# Altium PCB project_6.PcbDoc
Units mil, origin at the board's own origin, x right, y up, seen from the top; angles counter-clockwise.
Board outline 2962.9 x 2332.9 mil, 2 copper layers (Top Layer, Bottom Layer); 15 components, 40 nets, 96 pads, 3 vias.
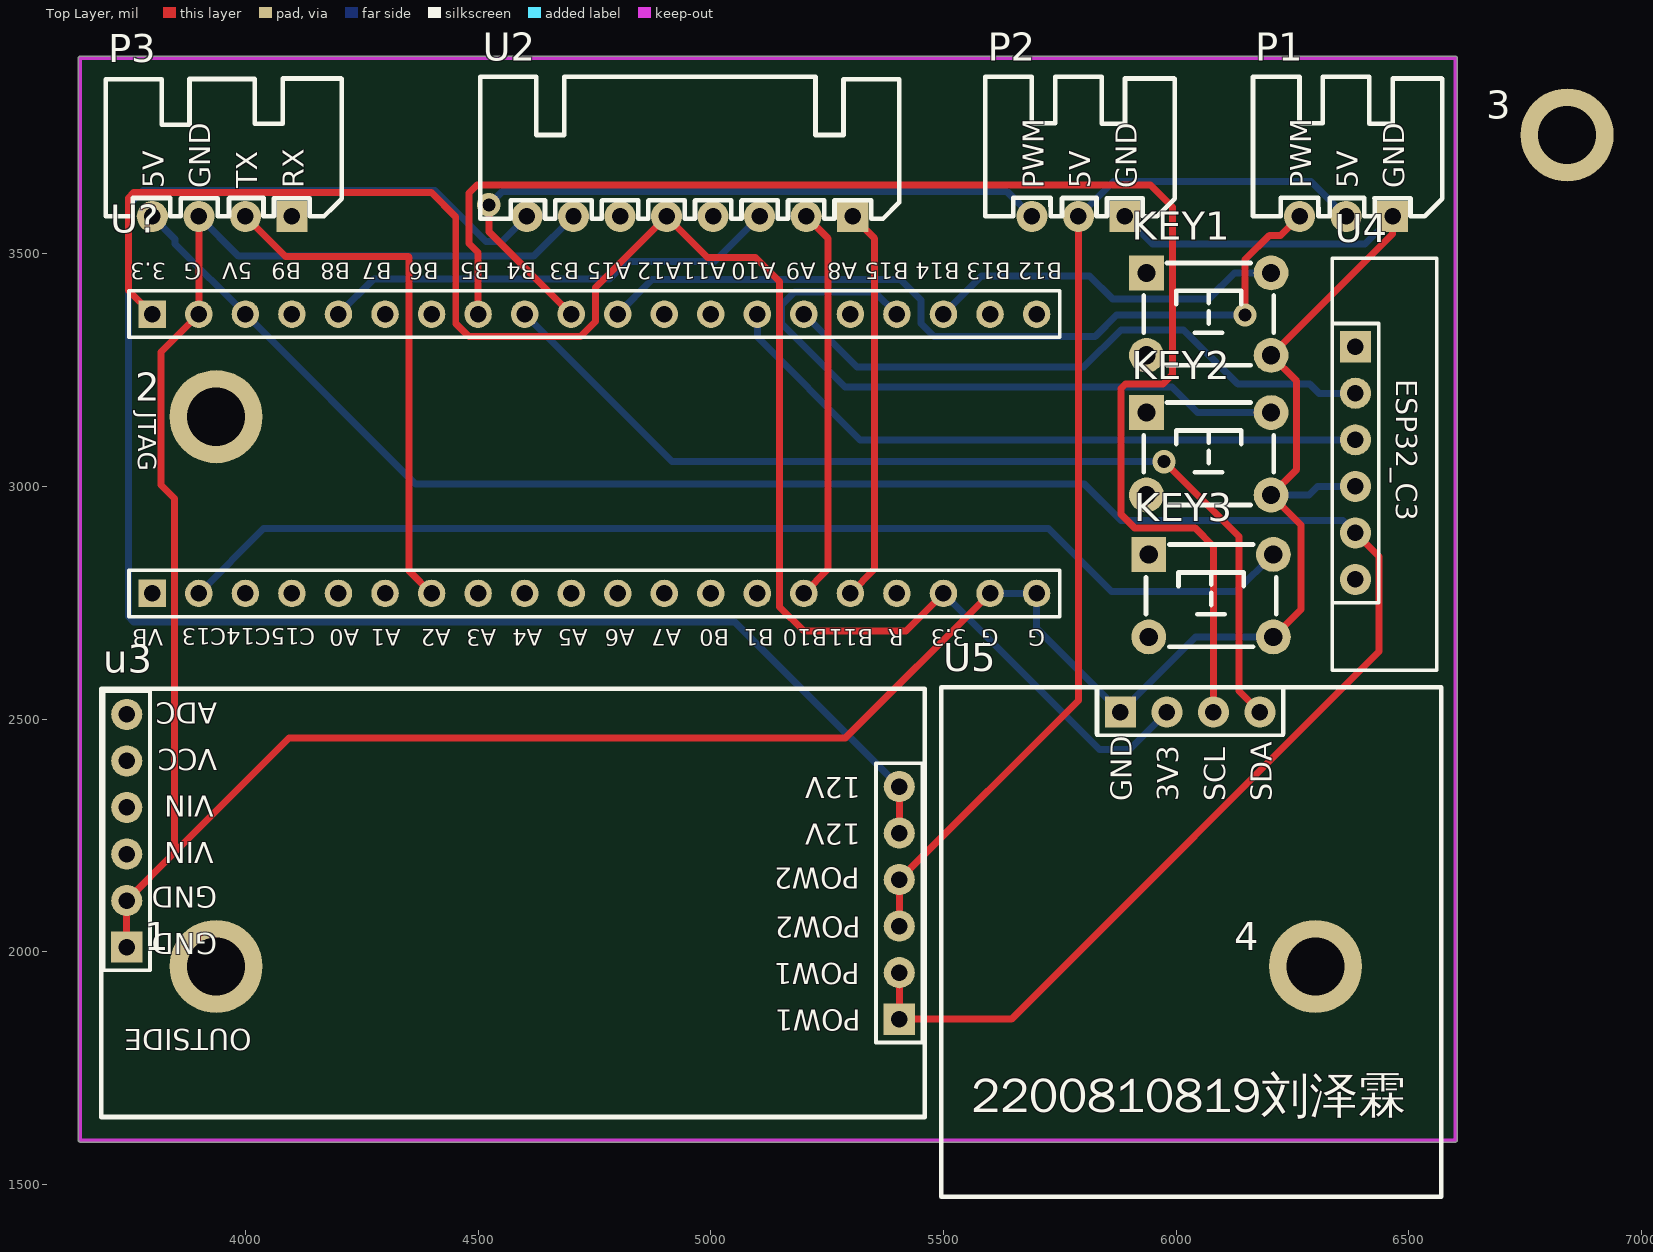
[diagram p0: Top Layer view]
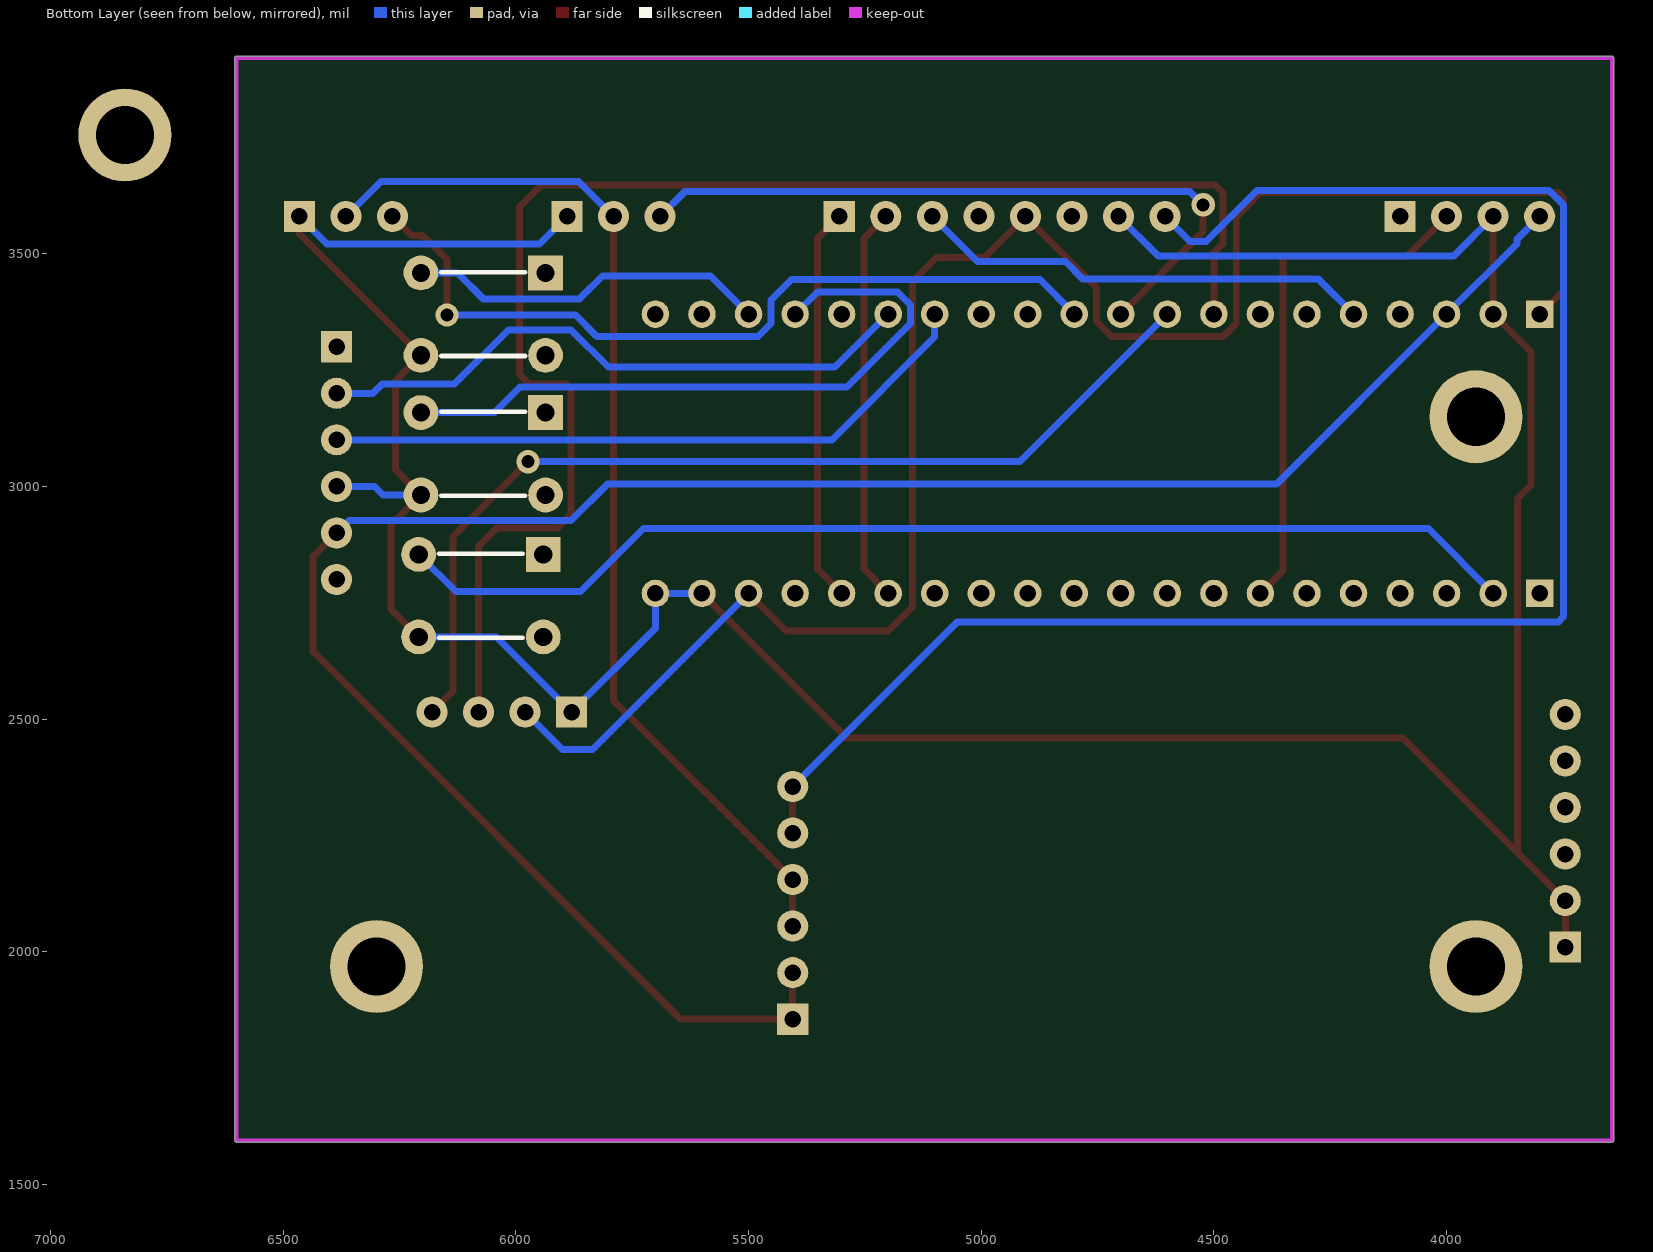
[diagram p1: Bottom Layer view, seen from below]

## Layer stack, top to bottom
Top Solder: solder mask 0.4, Solder Resist, Dk 3.5
Top Layer: signal copper 1.4
Dielectric 1: dielectric 12.6, FR-4, Dk 4.8
Bottom Layer: signal copper 1.4
Bottom Solder: solder mask 0.4, Solder Resist, Dk 3.5

## Board outline
3641.05,1595 ccw(c3645,1595) 3645,1591.05 6600,1591.05 ccw(c6600,1595) 6603.95,1595 6603.95,3920 ccw(c6600,3920) 6600,3923.95 3645,3923.95 ccw(c3645,3920) 3641.05,3920

## Design rules (kind name [scope] priority, off if disabled: settings)
Clearance [All] p1: gap=10 ignorepadtopadclearanceinfootprint=FALSE
PolygonConnect [All] p1: connectstyle=Relief reliefconductorwidth=10 reliefentries=4 polygonreliefangle="90 Angle" airgapwidth=10
RoutingVias [All] p1: holewidth=28 width=50 viastyle="Through Hole" minholewidth=28 minwidth=50 maxholewidth=28 maxwidth=50
SolderMaskExpansion [All] p1: expansion=4 istentingtop=FALSE
SupplyNets "Schematic Supply Nets_4" [InNet('5V_POW')] p1: voltage=0.000
SupplyNets "Schematic Supply Nets_3" [InNet('12V')] p2: voltage=0.000
SupplyNets "Schematic Supply Nets_2" [InNet('3V3')] p3: voltage=0.000
SupplyNets "Schematic Supply Nets_1" [InNet('5V')] p4: voltage=0.000
SupplyNets "Schematic Supply Nets" [InNet('GND')] p5: voltage=0.000
Width [All] p1: maxlimit=100 minlimit=10 preferedwidth=15 minimp=50.000000 maximp=50.000000 favimp=50.000000
30 further rules are at their usual default settings.

## Components (designator, comment, footprint, x,y, rotation, side; value= is the part's Value field where it differs from the comment)
1 "M3" "M3 125X200" 3937.01,1968.5 r90 top
2 "M3" "M3 125X200" 3937.01,3149.61 r90 top
3 "M3" "M3 125X200" 6840,3755 r90 top
4 "M3" "M3 125X200" 6299.21,1968.5 r90 top
KEY1 "mod_buttom" MOD_BUTTOM 6060,3370 r0 top
KEY2 "mod_buttom" MOD_BUTTOM 6060,3070 r0 top
KEY3 "mod_buttom" MOD_BUTTOM 6065,2765 r0 top
P1 "port_pwm_3p" XH2.54_3P 6380,3715 r0 top
P2 "port_pwm_3p" XH2.54_3P 5805,3715 r0 top
P3 "port_uart_4p" XH2.54_4P 3955,3735 r0 top
U2 "mod_ZDTMotor" XH2.54_8P 4940,3655 r90 top
u3 "pow_hw_2" POW_HW_2 4630,2085 r180 top
U4 "c3_hw_1" C3_HW_1 6385,3050 r270 top
U5 "mod_oled" MOD_OLED 6034.91,2513.15 r0 top
U? "f1_hw_2_gw" F1_HW_2_GW 4740,3060 r180 top

## Footprints (in the part's own frame and the unit in brackets; to place one, negate y for a bottom-side part, rotate by r counter-clockwise, add the part's x,y. Pads: shape width x height; smd on the part's side, far side on the other; paste and mask are expansions set on the pad)
C3_HW_1 [mm]
  rect 1.7x1.7 hole 0.9: 1(-6.35,0)
  round 1.7 hole 0.9: 2(-3.81,0) 3(-1.27,0) 4(1.27,0) 5(3.81,0) 6(6.35,0)
  silkscreen extent -11.18,-1.27 11.3,4.45, body extent -11.18,-1.27 11.3,4.45, height 8.5
F1_HW_2_GW [mm]
  rect 1.5x1.5 hole 0.9: 1(23.876,7.366) 21(23.876,-7.874)
  round 1.5 hole 0.9: 2(21.336,7.366) 3(18.796,7.366) 4(16.256,7.366) 5(13.716,7.366) 6(11.176,7.366) 7(8.636,7.366) 8(6.096,7.366) 9(3.556,7.366) 10(1.016,7.366) 11(-1.524,7.366) 12(-4.064,7.366) 13(-6.604,7.366) 14(-9.144,7.366) 15(-11.684,7.366) 16(-14.224,7.366) 17(-16.764,7.366) 18(-19.304,7.366) 19(-21.844,7.366) 20(-24.384,7.366) 22(21.336,-7.874) 23(18.796,-7.874) 24(16.256,-7.874) 25(13.716,-7.874) 26(11.176,-7.874) 27(8.636,-7.874) 28(6.096,-7.874) 29(3.556,-7.874) 30(1.016,-7.874) 31(-1.524,-7.874) 32(-4.064,-7.874) 33(-6.604,-7.874) 34(-9.144,-7.874) 35(-11.684,-7.874) 36(-14.224,-7.874) 37(-16.764,-7.874) 38(-19.304,-7.874) 39(-21.844,-7.874) 40(-24.384,-7.874)
  silkscreen extent -25.65,-9.14 25.15,8.64, body extent -26.92,-11.56 26.42,11.18, height 0.25
"M3 125X200" [mil] "M3螺丝孔，孔125Mil，焊盘200Mil"
  round 200 hole 125: 1(0,0)
MOD_BUTTOM [mm]
  rect 1.9x1.9 hole 1: 1(-3.146,2.25)
  round 1.9 hole 1: 2(-3.146,-2.25) 3(3.654,-2.25) 4(3.654,2.25)
  silkscreen extent -3.3,-2.79 3.81,2.79, body extent -3.85,-3 4.36,3, height 4.25
MOD_OLED [mm] "外购屏幕模块接口"
  rect 1.7x1.7 hole 0.9: 1(-3.935,0.047)
  round 1.7 hole 0.9: 2(-1.395,0.047) 3(1.145,0.047) 4(3.685,0.047)
  silkscreen extent -13.72,-26.4 13.58,1.4, body extent -13.72,-26.42 13.59,1.4, height 8.5
POW_HW_2 [mm] "pow_hw_2"
  round 1.7 hole 0.9: 0(22.479,-8.255) 1(22.479,-5.715) 1(22.479,-3.175) 2(22.479,-0.635) 3(-19.685,-6.858) 3(-19.685,-4.318) 4(-19.685,-1.778) 4(-19.685,0.762) 5(-19.685,3.302) 6(22.479,-10.795)
  rect 1.7x1.7 hole 0.9: 2(22.479,1.905) 5(-19.685,5.842)
  silkscreen extent -21.08,-12.19 23.88,11.18, body extent -21.08,-12.19 23.88,11.18, height 8.5
XH2.54_3P [mm]
  rect 1.7x1.7 hole 0.9: 1(2.159,-3.429)
  round 1.7 hole 0.9: 2(-0.381,-3.429) 3(-2.921,-3.429)
  silkscreen extent -5.46,-3.43 4.88,4.19, body extent -5.42,-3.78 4.66,3.92, height 5.73
XH2.54_4P [mm]
  rect 1.7x1.7 hole 0.9: 1(3.683,-3.937)
  round 1.7 hole 0.9: 2(1.143,-3.937) 3(-1.397,-3.937) 4(-3.937,-3.937)
  silkscreen extent -6.48,-3.94 6.4,3.59, body extent -6.44,-4.29 6.18,3.41, height 5.73
XH2.54_8P [mm]
  rect 1.7x1.7 hole 0.9: 1(-1.905,-9.271)
  round 1.7 hole 0.9: 2(-1.905,-6.731) 3(-1.905,-4.191) 4(-1.905,-1.651) 5(-1.905,0.889) 6(-1.905,3.429) 7(-1.905,5.969) 8(-1.905,8.509)
  silkscreen extent -2.03,-11.81 5.72,11.05, body extent -2.25,-11.77 5.44,11.01, height 5.75

## Part data
1 2 3 4: library part prot_m3, "m3铜柱孔", BOM名称=铜柱孔, 学习资源=www.ooocke.com, 版权归属=源创客
KEY1 KEY2 KEY3: "6*6*4.3按键"
P1 P2: "舵机接口 / XH2.54弯排针3p"
P3: "串口接口/SPP蓝牙模块 / XH2.54弯排针4p/4p排母"
U2: "闭环步进,10-29V"
u3: "两路升降压电源模块 / 6p排母*2"
U4: "ESP32C3蓝牙模块 / 6p排母"
U5: "oled模块 / 4p排母"

## Via types
v1: diameter 50, hole 28, Top Layer to Bottom Layer, 3 vias

## Nets (pads, with @x,y where several pads share a name; then routed paths per layer and width w, separated by ;. In a path a pad name is that pad's centre, name@x,y a point inside that pad or via, vN(x,y) a via of type N, cw(c..) or ccw(c..) an arc to the next point about the centre after c; other vN are vias at no path point)
3V3: U2.5 U5.2 U?.18 U?.21 | length 3902.4
  Top Layer w15: U?.21 3749,3421 3749,3620 3760,3631 4400,3631 4452,3579 4452,3350 4480,3322 4720,3322 4752,3354 4752,3427 U2.5 4993,3492 5096,3492 5148,3440 5148,2741 5200,2689 5419,2689 U?.18
  Bottom Layer w15: U?.18 5835,2435 5900,2435 U5.2
5V: P3.4 u3.5 U4.5 U?.23 | length 4606.9
  Top Layer w15: u3.5@5405,1955 5405,1855 5646,1855 6436,2645 6436,2849 U4.5
  Bottom Layer w15: P3.4 3849,3531 3849,3521 U?.23 4365,3005 5802.52,3005 5881,2926.52 6358.48,2926.52 U4.5
5V_POW: P1.2 P2.2 u3.4 | length 2321.6
  Top Layer w15: u3.4@5405,2055 5405,2155 5790,2540 P2.2
  Bottom Layer w15: P2.2 5865,3655 6290,3655 P1.2
12V: U2.8 u3.3 | length 3729
  Top Layer w15: u3.3@5405,2255 u3.3@5405,2355
  Bottom Layer w15: U2.8 4551,3526 4517,3526 4407,3636 3780,3636 3749,3605 3749,2720 3760,2709 5051,2709 u3.3@5405,2355
GND: KEY1.3 KEY2.3 KEY3.3 P1.1 P2.1 P3.3 U2.7 u3.2 U4.4 U5.1 U?.19 U?.20 U?.22 | length 7263.3
  Top Layer w15: u3.2@3745,2010 3745,2110 3848,2213 ; P3.3 U?.22 3819,3289 3819,3003 3848,2974 3848,2213 ; U?.19 5289,2459 4094,2459 3848,2213 ; KEY3.3 6268,2735.56 6268,2917.28 KEY2.3 6259,3036.56 6259,3226.28 KEY1.3 6465,3542.56 P1.1
  Bottom Layer w15: P3.3 3985.53,3494.47 4619.47,3494.47 U2.7 ; U?.19 U?.20 5700,2695 U5.1 6041.42,2676.42 KEY3.3 ; P2.1 5949,3521 6406,3521 P1.1 ; KEY2.3 6285,2981.42 6303.58,3000 U4.4
NRST: U?.17
PA0: U?.5
PA1: U?.6
PA2: P3.2 U?.7 | length 1130.3
  Top Layer w15: P3.2 4086,3494 4350,3494 4352,3492 4352,2818 U?.7
PA3: U?.8
PA4: U?.9
PA5: U?.10
PA6: U?.11
PA7: U?.12
PA8: U?.36
PA9: U4.2 U?.35 | length 1322
  Bottom Layer w15: U?.35 5314,3256 5800.92,3256 5881.24,3336.32 6016.04,3336.32 6132.36,3220 6287,3220 6307,3200 U4.2
PA10: U4.3 U?.34 | length 1425.7
  Bottom Layer w15: U?.34 5100,3320.71 5320.71,3100 U4.3
PA11: U?.33
PA12: U?.32
PA15: P1.3 U?.31 | length 1752.1
  Top Layer w15: v1(6148,3368) 6148,3487 6200,3539 6224,3539 P1.3
  Bottom Layer w15: U?.31 4874,3444 5408,3444 5452,3400 5452,3350 5480,3322 5826,3322 5872,3368 v1(6148,3368)
PB0: U?.13
PB1: U?.14
PB3: P2.3 U?.30 | length 1509.7
  Top Layer w15: v1(4523,3605) 4523,3547 U?.30
  Bottom Layer w15: v1(4523,3605) 4552,3634 5636,3634 P2.3
PB4: U5.4 U?.29 | length 2128.6
  Top Layer w15: v1(5974,3053) 6135,2892 6135,2560 U5.4
  Bottom Layer w15: U?.29 4917,3053 v1(5974,3053)
PB5: U5.3 U?.28 | length 3143.5
  Top Layer w15: U?.28 4500,3502.5 4480.5,3522 4480.5,3630 4498,3647.5 5944.5,3647.5 5992,3600 5992,3240 5972,3220 5891,3220 5881,3210 5881,2940 5910,2911 6040,2911 6080,2871 U5.3
PB6: U?.27
PB7: U?.26
PB8: U2.3 U?.25 | length 992
  Bottom Layer w15: U?.25 4276,3446 4782,3446 4819,3483 5008,3483 U2.3
PB9: U?.24
PB10: U2.2 U?.15 | length 851
  Top Layer w15: U?.15 5252,2822 5252,3533 U2.2
PB11: U2.1 U?.16 | length 851
  Top Layer w15: U?.16 5352,2822 5352,3533 U2.1
PB12: U?.40
PB13: U?.39
PB14: KEY1.4 U?.38 | length 781.1
  Bottom Layer w15: U?.38 5582,3452 5814,3452 5863,3403 6070,3403 6125.58,3458.58 KEY1.4
PB15: KEY2.4 U?.37 | length 1450.6
  Bottom Layer w15: U?.37 5352,3418 5180,3418 5152,3390 5152,3350 5288.52,3213.48 5991.04,3213.48 6045.95,3158.58 KEY2.4
PC13: KEY3.4 U?.2 | length 2455.6
  Bottom Layer w15: U?.2 4039,2909 5725.92,2909 5861.24,2773.68 6128.96,2773.68 KEY3.4
PC14: U?.3
PC15: U?.4
USART2_RX: P3.1
VBAT: U?.1
pads on no net: 1.1 2.1 3.1 4.1 KEY1.1 KEY1.2 KEY2.1 KEY2.2 KEY3.1 KEY3.2 U2.4 U2.6 u3.0 u3.1 u3.6 U4.1 U4.6

## Keep-outs
Keep-Out Layer:
  lines w7.87: 3645,3895 3645,3920 6600,3920 6600,1595 3645,1595 3645,3905

## Silkscreen, mask and mechanical layers (free items; w line width, h text height)
Top Overlay:
  text "2200810819刘泽霖" at 5560,1630 h130

## Text inside footprints (layer, text, board x,y; h text height)
P1: Top Overlay "GND" at 6490,3640 h45 r90; Top Overlay "5V" at 6390,3640 h45 r90; Top Overlay "PWM" at 6290,3640 h45 r90
P2: Top Overlay "GND" at 5915,3640 h45 r90; Top Overlay "5V" at 5815,3640 h45 r90; Top Overlay "PWM" at 5715,3640 h45 r90
P3: Top Overlay "5V" at 3825,3640 h45 r90; Top Overlay "GND" at 3925,3640 h45 r90; Top Overlay "TX" at 4025,3640 h45 r90; Top Overlay "RX" at 4125,3640 h45 r90
u3: Top Overlay "POW2" at 5320,2180 h45 r180; Top Overlay "POW1" at 5320,1975 h45 r180; Top Overlay "12V" at 5322.38,2375 h45 r180; Top Overlay "12V" at 5322.38,2275 h45 r180; Top Overlay "POW2" at 5322.38,2075 h45 r180; Top Overlay "POW1" at 5322.38,1875 h45 r180; Top Overlay "GND" at 3940,2140 h45 r180; Top Overlay "GND" at 3940,2040 h45 r180; Top Overlay "VIN" at 3932.5,2335 h45 r180; Top Overlay "VIN" at 3932.5,2235 h45 r180; Top Overlay "ADC" at 3940,2535 h45 r180; Top Overlay "VCC" at 3940,2435 h45 r180; Top Overlay "OUTSIDE" at 4014.16,1833.77 h45 r180
U4: Top Overlay "ESP32_C3" at 6472.5,3230 h45 r270
U5: Top Overlay "3V3" at 6004.91,2323.15 h45 r90; Top Overlay "SCL" at 6104.91,2323.15 h45 r90; Top Overlay "SDA" at 6204.91,2323.15 h45 r90; Top Overlay "GND" at 5904.91,2323.15 h45 r90
U?: Top Overlay "JTAG" at 3770,3160 h39.37 r270; Top Overlay "R" at 5415,2693 h35.43 r180; Top Overlay "B11" at 5349,2693 h35.43 r180; Top Overlay "B10" at 5250,2693 h35.43 r180; Top Overlay "B1" at 5135,2693 h35.43 r180; Top Overlay "B0" at 5040,2693 h35.43 r180; Top Overlay "A0" at 4245,2693 h35.43 r180; Top Overlay "A1" at 4334,2693 h35.43 r180; Top Overlay "A2" at 4440.71,2693 h35.43 r180; Top Overlay "A3" at 4538.57,2693 h35.43 r180; Top Overlay "A4" at 4638,2693 h35.43 r180; Top Overlay "A5" at 4736,2693 h35.43 r180; Top Overlay "A6" at 4837,2693 h35.43 r180; Top Overlay "A7" at 4937,2693 h35.43 r180; Top Overlay "VB" at 3824,2693 h35.43 r180; Top Overlay "3.3" at 5550,2693 h35.43 r180; Top Overlay "G" at 5619,2693 h35.43 r180; Top Overlay "G" at 5719,2693 h35.43 r180; Top Overlay "B12" at 5755,3480 h35.43 r180; Top Overlay "B13" at 5645,3480 h35.43 r180; Top Overlay "B14" at 5535,3480 h35.43 r180; Top Overlay "B15" at 5425,3480 h35.43 r180; Top Overlay "A8" at 5315,3480 h35.43 r180; Top Overlay "A9" at 5225,3480 h35.43 r180; Top Overlay "A10" at 5140,3480 h35.43 r180; Top Overlay "A11" at 5032,3480 h35.43 r180; Top Overlay "A12" at 4937,3480 h35.43 r180; Top Overlay "A15" at 4829,3480 h35.43 r180; Top Overlay "B3" at 4717,3480 h35.43 r180; Top Overlay "B4" at 4625,3480 h35.43 r180; Top Overlay "B5" at 4525,3480 h35.43 r180; Top Overlay "B6" at 4415,3480 h35.43 r180; Top Overlay "B7" at 4315,3480 h35.43 r180; Top Overlay "B8" at 4225,3480 h35.43 r180; Top Overlay "B9" at 4120,3480 h35.43 r180; Top Overlay "5V" at 4015,3480 h35.43 r180; Top Overlay "G" at 3905,3480 h35.43 r180; Top Overlay "3.3" at 3830,3480 h35.43 r180; Top Overlay "C15C14C13" at 4150,2695 h35.43 r180